# Altium PCB relay.PcbDoc (part 1 of 4)
Units mil, origin at the board's own origin, x right, y up, seen from the top; angles counter-clockwise.
Board outline 5718.69 x 3947.04 mil, 2 copper layers (Top Layer, Bottom Layer); 122 components, 108 nets, 435 pads, 81 vias.
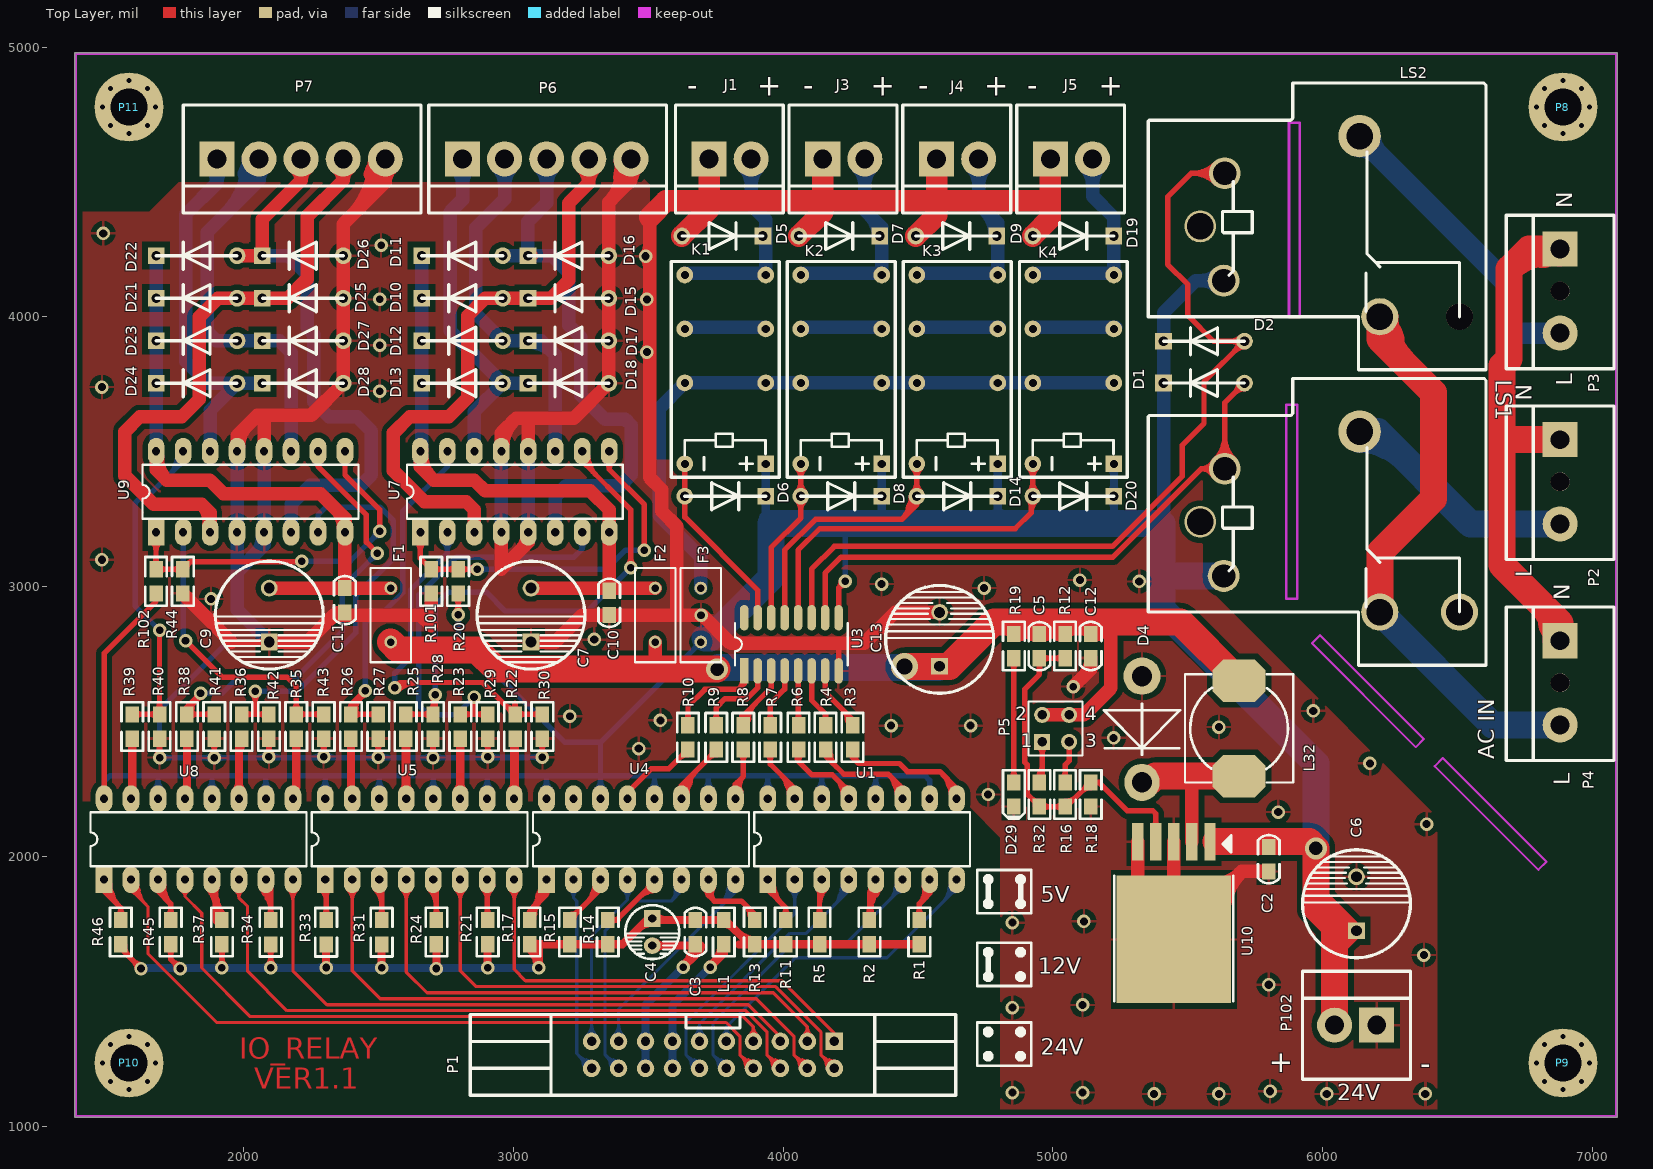
[diagram p0: Top Layer view]
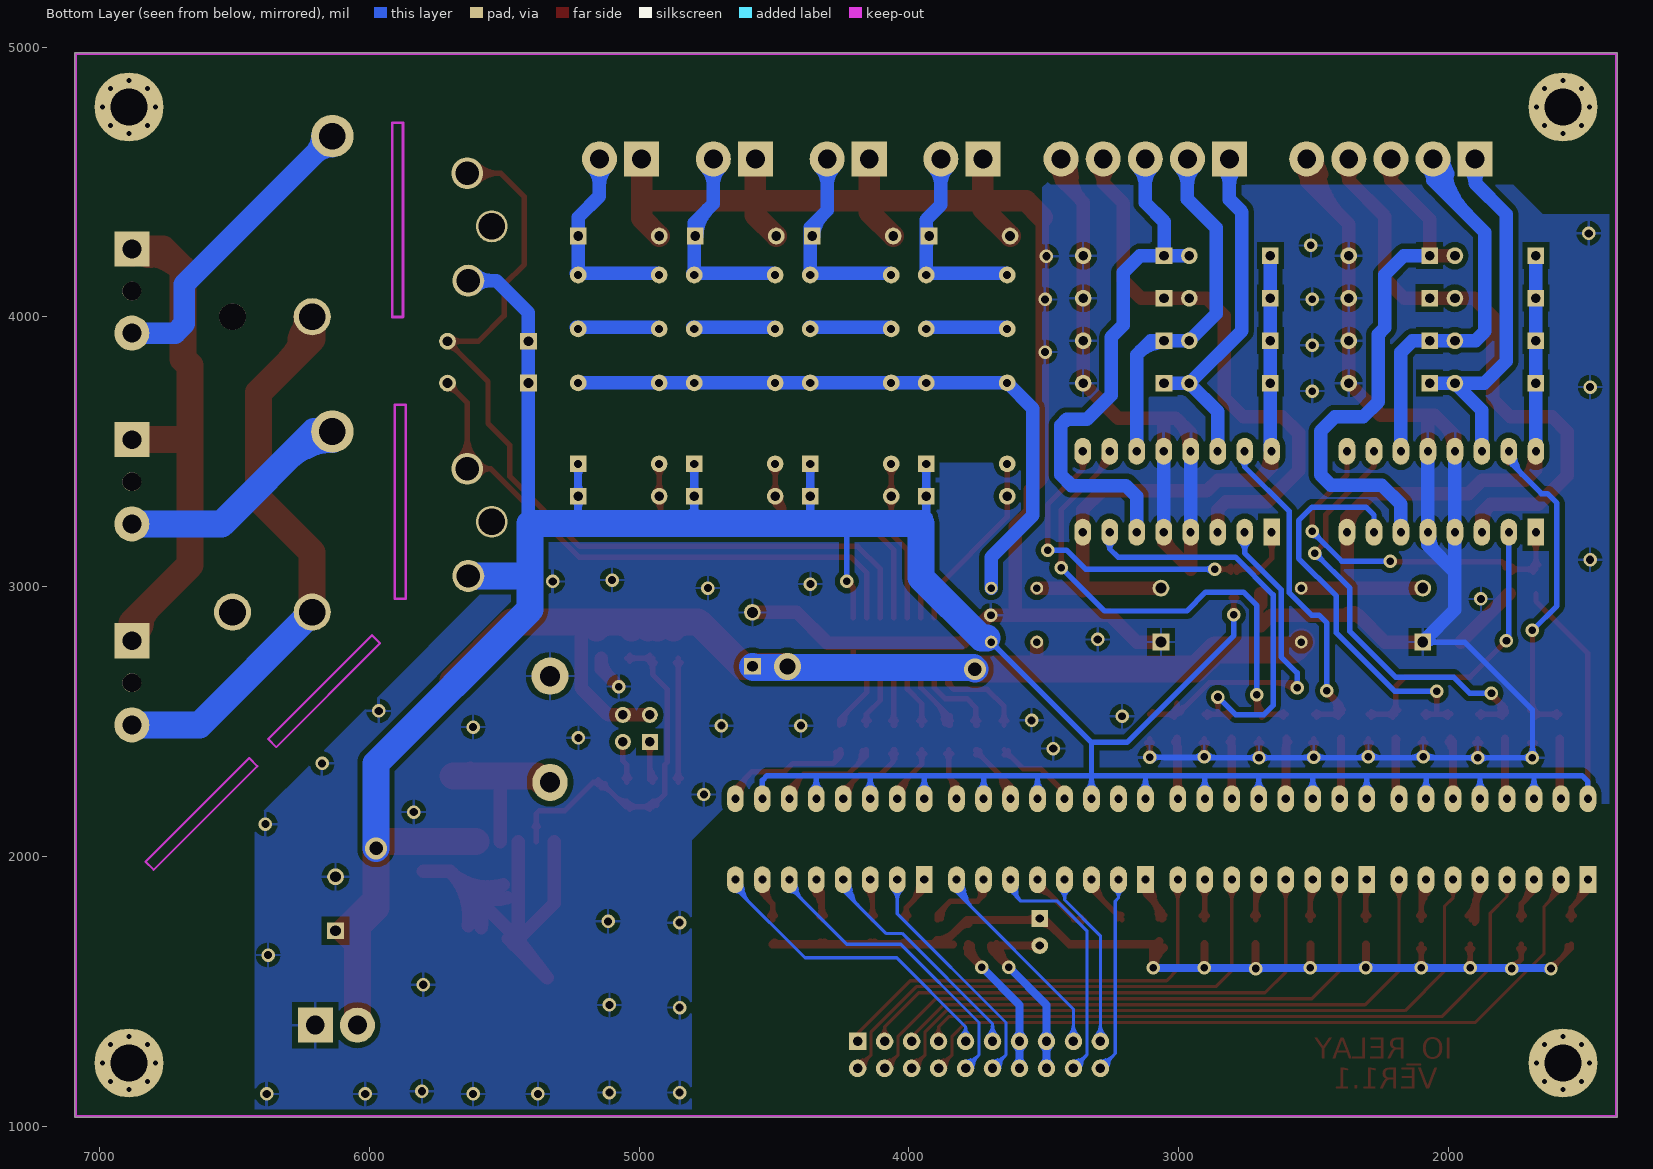
[diagram p1: Bottom Layer view, seen from below]

## Layer stack, top to bottom
Top Layer: signal copper 1.4
Dielectric: dielectric 12.6, FR-4, Dk 4.8
Bottom Layer: signal copper 1.4

## Board outline
1373.69,1037.99 ccw(c1378.7,1037.99) 1378.7,1032.98 7087.36,1032.98 ccw(c7087.36,1037.99) 7092.38,1037.99 7092.38,4975 ccw(c7087.36,4975) 7087.36,4980.02 1378.7,4980.02 ccw(c1378.7,4975) 1373.69,4975

## Design rules (kind name [scope] priority, off if disabled: settings)
Clearance Clearance_1 [IsRegion] p1: gap=20
Clearance [All] p2: gap=10
ComponentClearance [All] p1: gap=0 collisioncheckmode=3 verticalgap=10 showdistances=FALSE
PolygonConnect [All] p1: connectstyle=Relief reliefconductorwidth=10 reliefentries=4 polygonreliefangle="90 Angle"
RoomDefinition relay [InComponentClass('relay')] p1: confinementstyle=ConfineIn formatcopy=TRUE lockcomponents=FALSE outline 1433.6,1092.89 1433.6,4920.1 7032.46,4920.1 7032.46,4415 7051.63,4415 7051.63,1762 7032.46,1762 7032.46,1092.89
RoutingVias [All] p1: holewidth=28 width=50 viastyle="Through Hole" minholewidth=28 minwidth=50 maxholewidth=28 maxwidth=50
SilkscreenOverComponentPads [All] p1: minsilkscreentomaskgap=10
SolderMaskExpansion [All] p1: expansion=4
Width [All] p1: maxlimit=100 minlimit=10 preferedwidth=10
26 further rules are at their usual default settings.

## Components (designator, comment, footprint, x,y, rotation, side; value= is the part's Value field where it differs from the comment)
C2 "100nF" C0805 5800,1945 r90 top
C3 "100nF" C0805 3675,1675 r90 top
C4 "47uF/16V" CD1/2 3515,1670 r180 top
C5 "10nF" C0805 4950,2825 r270 top
C6 "100uF/50V" CD2/4#1 6125,1925 r0 top
C7 "100uF/50V" CD2/4#2 3065.63,2795 r180 top
C9 "100uF/50V" CD2/4#2 2095.63,2795 r180 top
C10 "100nF" C0805 3355.63,2895 r90 top
C11 "100nF" C0805 2375.63,2905 r90 top
C12 "100nF" C0805 5140,2735 r90 top
C13 "100uF/50V" CD2/4#1 4580,2905 r0 top
D1 "1N4007" V3 5410,3755 r180 top
D2 "1N4007" V3 5410,3910 r180 top
D4 "D1N5822" DO-201AD-H 5330,2668.7 r270 top
D5 "1N4007" V3 3925,4300 r0 top
D6 "1N4007" V3 3935.63,3335.55 r0 top
D7 "1N4007" V3 4358.33,4300 r0 top
D8 "1N4007" V3 4365.63,3335.55 r0 top
D9 "1N4007" V3 4791.67,4300 r0 top
D10 "1N4007" V3 2660.43,4069.49 r180 top
D11 "1N4007" V3 2660.43,4226.97 r180 top
D12 "1N4007" V3 2660.43,3912.01 r180 top
D13 "1N4007" V3 2660.43,3754.53 r180 top
D14 "1N4007" V3 4795.63,3335.55 r0 top
D15 "1N4007" V3 3054.13,4069.49 r180 top
D16 "1N4007" V3 3054.13,4226.97 r180 top
D17 "1N4007" V3 3054.13,3912.01 r180 top
D18 "1N4007" V3 3054.13,3754.53 r180 top
D19 "1N4007" V3 5225,4300 r0 top
D20 "1N4007" V3 5225.63,3335.55 r0 top
D21 "1N4007" V3 1676.18,4069.49 r180 top
D22 "1N4007" V3 1676.18,4226.97 r180 top
D23 "1N4007" V3 1676.18,3912.01 r180 top
D24 "1N4007" V3 1676.18,3754.53 r180 top
D25 "1N4007" V3 2069.88,4069.49 r180 top
D26 "1N4007" V3 2069.88,4226.97 r180 top
D27 "1N4007" V3 2069.88,3912.01 r180 top
D28 "1N4007" V3 2069.88,3754.53 r180 top
D29 "LED0" LED0805 4855,2275 r270 top
F1 "FRK300-60F" RAD-0.2 2545.63,2895 r270 top
F2 "FRK300-60F" RAD-0.2 3525.63,2895 r270 top
F3 "FRK300-60F" RAD-0.2 3695,2895 r90 top
J1 "下灯" 3.96-2 3725.63,4585.55 r180 top
J3 "Valve" 3.96-2 4146.73,4585.55 r180 top
J4 "档板" 3.96-2 4568.73,4585.55 r180 top
J5 "放气阀" 3.96-2 4990.73,4585.55 r180 top
K1 "DS2Y-S-DC24V" DS2Y-S 3935.63,3455.55 r270 top
K2 "DS2Y-S-DC24V" DS2Y-S 4365.63,3455.55 r270 top
K3 "DS2Y-S-DC24V" DS2Y-S 4795.63,3455.55 r270 top
K4 "DS2Y-S-DC24V" DS2Y-S 5225.63,3455.55 r270 top
L1 "BLM21PG331SN1" L0805 3780,1675 r90 top
L32 "5SLF10145T-470M1R" SLF10145 5690,2475 r180 top
LS1 "NT90RN1C" NT90HCE12CE#1 6616.73,3775.39 r270 top
LS2 "NT90RN1C" NT90HCE12CE#2 6616.73,4870.2 r270 top
P1 "RELAY" IDC20-EJ 4190,1315 r180 top
P2 "机械泵" 3.96-3 6880,3233 r90 top
P3 "真空计" 3.96-3 6880,3940 r90 top
P4 "AC IN" 3.96-3 6880,2488 r90 top
P5 "Header 2X2" HDR2X2 4960,2425 r0 top
P6 "Header 5" 3.96-5 2811.73,4585.55 r180 top
P7 "Header 5" 3.96-5 1901.47,4585.55 r180 top
P8 "Header 9" LK 6890.51,4778.15 r0 top
P9 "Header 9" LK 6890.51,1234.84 r0 top
P10 "Header 9" LK 1575.55,1234.84 r0 top
P11 "Header 9" LK 1575.55,4778.15 r0 top
P102 "24V" 3.96-2 6200,1375 r0 top
R1 "510" R0805 4505,1765 r270 top
R2 "510" R0805 4320,1765 r270 top
R3 "10K" R0805 4257.27,2396.89 r90 top
R4 "10K" R0805 4157.27,2396.89 r90 top
R5 "510" R0805 4135,1765 r270 top
R6 "10K" R0805 4057.27,2396.89 r90 top
R7 "10K" R0805 3952.27,2396.89 r90 top
R8 "10K" R0805 3852.27,2396.89 r90 top
R9 "10K" R0805 3752.27,2396.89 r90 top
R10 "10K" R0805 3647.27,2396.89 r90 top
R11 "510" R0805 4010,1765 r270 top
R12 "20K" R0805 5045,2735 r90 top
R13 "510" R0805 3895,1765 r270 top
R14 "510" R0805 3350,1765 r270 top
R15 "510" R0805 3210,1765 r270 top
R16 "6.8K" R0805 5045,2185 r90 top
R17 "510" R0805 3060,1765 r270 top
R18 "1K" R0805 5140,2275 r270 top
R19 "2.5K" R0805 4855,2735 r90 top
R20 "10K" R0805 2795.63,3065 r270 top
R21 "510" R0805 2905,1765 r270 top
R22 "10K" R0805 3006.35,2436.89 r90 top
R23 "10K" R0805 2803.64,2436.89 r90 top
R24 "510" R0805 2715,1765 r270 top
R25 "10K" R0805 2600.94,2436.89 r90 top
R26 "10K" R0805 2398.23,2436.89 r90 top
R27 "2.5K" R0805 2499.58,2436.89 r90 top
R28 "2.5K" R0805 2702.29,2436.89 r90 top
R29 "2.5K" R0805 2905,2436.89 r90 top
R30 "2.5K" R0805 3107.7,2436.89 r90 top
R31 "510" R0805 2512.1,1764.29 r270 top
R32 "20K" R0805 4950,2185 r90 top
R33 "510" R0805 2306.29,1764.29 r270 top
R34 "510" R0805 2100.49,1764.29 r270 top
R35 "10K" R0805 2195.53,2436.89 r90 top
R36 "10K" R0805 1992.82,2436.89 r90 top
R37 "510" R0805 1920,1765 r270 top
R38 "10K" R0805 1790.11,2436.89 r90 top
R39 "10K" R0805 1587.41,2436.89 r90 top
R40 "2.5K" R0805 1688.76,2436.89 r90 top
R41 "2.5K" R0805 1891.47,2436.89 r90 top
R42 "2.5K" R0805 2094.17,2436.89 r90 top
R43 "2.5K" R0805 2296.88,2436.89 r90 top
R44 "2.5K" R0805 1775,2975 r90 top
R45 "510" R0805 1730,1765 r270 top
R46 "510" R0805 1545,1765 r270 top
R101 "2.5K" R0805 2695.63,2975 r90 top
R102 "10K" R0805 1675.63,2975 r90 top
U1 "TLP521-4" DIP16 3943.07,1914.29 r90 top
U3 "ULN2003A" so16 3855.63,2688.15 r90 top
U4 "TLP521-4" DIP16 3123.07,1914.29 r90 top
U5 "TLP521-4" DIP16 2303.07,1914.29 r90 top
U7 "L293D" DIP16 2655.47,3202.09 r90 top
U8 "TLP521-4" DIP16 1483.07,1914.29 r90 top
U9 "L293D" DIP16 1676.18,3202.09 r90 top
U10 "LM2596S-5.0" TO263-5 5582,2055 r180 top

## Footprints (in the part's own frame and the unit in brackets; to place one, negate y for a bottom-side part, rotate by r counter-clockwise, add the part's x,y. Pads: shape width x height; smd on the part's side, far side on the other; paste and mask are expansions set on the pad)
3.96-2 [mil]
  rect 130x130 hole 70: 1(0,0)
  round 130 hole 70: 2(-156,0)
  silkscreen extent -275,-200 125,200
3.96-3 [mil]
  rect 130x130 hole 70: 1(312,0)
  round 70 hole 70 unplated: 2(156,0)
  round 130 hole 70: 3(0,0)
  silkscreen extent -132,-200 437,200
3.96-5 [mil]
  rect 130x130 hole 70: 1(0,0)
  round 130 hole 70: 2(-156,0) 3(-312,0) 4(-468,0) 5(-624,0)
  silkscreen extent -756,-200 125,200
C0805 [mil]
  rect 60x50 smd: 1(0,0) 2(90,0)
  silkscreen extent -44,-40 135,40
CD1/2 [mil]
  rect 62x62 hole 30: 1(0,-100)
  round 62 hole 30: 2(0,0)
  silkscreen extent -100,-150 100,50
CD2/4#1 [mil]
  rect 62x62 hole 40: 1(0,-200)
  round 62 hole 40: 2(0,0)
  silkscreen extent -200,-300 200,100
CD2/4#2 [mil]
  round 62 hole 40: 1(0,-200)
  rect 62x62 hole 40: 2(0,0)
  silkscreen extent -200,-300 200,100
DIP16 [mil]
  rect 100x62 hole 30: 1(0,0)
  oval 100x62 hole 30: 2(0,-100) 3(0,-200) 4(0,-300) 5(0,-400) 6(0,-500) 7(0,-600) 8(0,-700) 9(300,-700) 10(300,-600) 11(300,-500) 12(300,-400) 13(300,-300) 14(300,-200) 15(300,-100) 16(300,0)
  silkscreen extent 50,-750 250,50
DO-201AD-H [mm]
  round 3.5 hole 1.905: 1(0,0)
  oval 3.5x3.3 hole 1.905: 2(10,0)
  silkscreen extent 2.6,-3.6 7.4,3.6
DS2Y-S [mil]
  rect 62x62 hole 30: 1(0,0)
  round 62 hole 30: 4(-300,0) 6(-500,0) 8(-700,0) 9(-700,-300) 11(-500,-300) 13(-300,-300) 16(0,-300)
  silkscreen extent -750,-350 50,50
HDR2X2 [mm] "Connector; Header; 2x2 Position"
  rect 1.5x1.5 hole 0.9: 1(0,0)
  round 1.5 hole 0.9: 2(0,2.54) 3(2.54,0) 4(2.54,2.54)
  silkscreen extent -1.27,-1.27 3.81,3.81
IDC20-EJ [mil]
  rect 65x65 hole 35: 1(0,0)
  round 65 hole 35: 2(0,100) 3(100,0) 4(100,100) 5(200,0) 6(200,100) 7(300,0) 8(300,100) 9(400,0) 10(400,100) 11(500,0) 12(500,100) 13(600,0) 14(600,100) 15(700,0) 16(700,100) 17(800,0) 18(800,100) 19(900,0) 20(900,100)
  silkscreen extent -450,-100 1350,200
L0805 [mil]
  rect 60x50 smd: 1(0,0) 2(90,0)
  silkscreen extent -45,-40 135,40
LED0805 [mil]
  rect 60x50 smd: 1(0,0) 2(90,0)
  silkscreen extent -45,-40 135,40
LK [mm]
  round 6.5 hole 3.5: 1(0,0)
  round 1 hole 0.5: 2(0,2.5) 3(2.5,0) 4(0,-2.5) 5(-1.75,-1.75) 6(-1.75,1.75) 7(1.75,1.75) 8(1.75,-1.75) 9(-2.5,0)
NT90HCE12CE#1 [mm]
  round 4 hole 2.5: 1(5.08,-12.192)
  round 3.5 hole 2.5: 2(22.08,-2.792) 3(22.08,-10.292)
  round 3 hole 2.2: 4(18.68,-24.992) 5(8.58,-24.892)
  round 3 hole 2.5: 6(13.58,-27.192)
  silkscreen extent 0.08,-32.09 27.08,-0.29
NT90HCE12CE#2 [mm]
  round 4 hole 2.5: 1(5.08,-12.192)
  round 2.5 hole 2.5: 2(22.08,-2.792)
  round 3.5 hole 2.5: 3(22.08,-10.292)
  round 3 hole 2.2: 4(18.68,-24.992) 5(8.58,-24.892)
  round 3 hole 2.5: 6(13.58,-27.192)
  silkscreen extent 0.08,-32.09 27.08,-0.29
R0805 [mil]
  rect 60x50 smd: 1(0,0) 2(90,0)
  silkscreen extent -45,-40 135,40
RAD-0.2 [mm] "Radial Cap, Thru-Hole; 2 Leads; 0.2 in Pin Spacing"
  round 1.2 hole 0.7: 1(-2.54,0) 2(2.54,0)
  silkscreen extent -4.44,-1.91 4.44,1.91
SLF10145 [mm]
  oct 5x4 smd: 1(0,4.5) 2(0,-4.5)
  silkscreen extent -5.1,-5.1 5.1,5.1
so16 [mm]
  rect 2.4x0.8 smd: 1(0,0)
  oval 2.4x0.8 smd: 2(0,-1.27) 3(0,-2.54) 4(0,-3.81) 5(0,-5.08) 6(0,-6.35) 7(0,-7.62) 8(0,-8.89) 9(5,-8.89) 10(5,-7.62) 11(5,-6.35) 12(5,-5.08) 13(5,-3.81) 14(5,-2.54) 15(5,-1.27) 16(5,0)
  silkscreen extent 0.5,-9.74 4.5,0.85
TO263-5 [mil]
  rect 42x137.8 smd: 1(0,0) 2(67,0) 3(134,0) 4(201,0) 5(268,0)
  rect 425x472.44 smd: A(133.86,362.2)
  silkscreen extent -87,-24 354,591
V3 [mil]
  round 62 hole 36: 1(-300,0)
  rect 62x62 hole 36: 2(0,0)
  silkscreen extent -300,-50 0,50

## Part data
C2 C3 C5 C10 C11 C12: library part Cap, "C"
C4: library part CD1, "Electrolytic Capac"
C6 C7 C9 C13: library part "Cap Pol1", "Polarized Capacitor (Rad"
D1 D2 D5 D6 D7 D8 D9 D10 D11 D12 D13 D14 D15 D16 D17 D18 D19 D20 D21 D22 D23 D24 D25 D26 D27 D28: library part 2JG, "D"
D4: library part DIODE, "D"
D29: "Typical INFRARED"
F1 F2 F3: library part FUSE1, "Fuse"
J1 J3 J4 J5: library part CON2, "Connect"
K1 K2 K3 K4: library part DS
LS1 LS2: library part NT90
P1: library part "Header 10X2", "Header, 10-Pin, Dual r"
P2 P3 P4: library part "Header 3H", "Header, 3-Pin, Right Ang"
P5: "Header, 2-Pin, Dual row"
P6 P7: "Header, 5-P"
P8 P9 P10 P11: "Header, 9-P"
P102: library part "Header 2", "Header, 2-P"
R1 R2 R3 R4 R5 R6 R7 R8 R9 R10 R11 R12 R13 R14 R15 R16 R17 R18 R19 R20 R21 R22 R23 R24 R25 R26 R27 R28 R29 R30 R31 R32 R33 R34 R35 R36 R37 R38 R39 R40 R41 R42 R43 R44 R45 R46 R101 R102: library part Res1
U1 U4 U5 U8: library part TLP5
U3: "HIGH-VOLTAGE,HIGH-CURRENT DARLINGTON ARRAYS"
U7 U9: library part L29
U10: library part LM2596, "SIMPLESWITCHER PowerConverter150kHz 3A Step-DownVoltageR"

## Via types
v1: diameter 50, hole 28, Top Layer to Bottom Layer, 42 vias
v2: diameter 50, hole 30, Top Layer to Bottom Layer, 36 vias
v3: diameter 80, hole 50, Top Layer to Bottom Layer, 2 vias
v4: diameter 100, hole 60, Top Layer to Bottom Layer, 1 vias

## Nets (pads, with @x,y where several pads share a name; then routed paths per layer and width w, separated by ;. In a path a pad name is that pad's centre, name@x,y a point inside that pad or via, vN(x,y) a via of type N, cw(c..) or ccw(c..) an arc to the next point about the centre after c; other vN are vias at no path point)
+5V: C3.2 C4.1 L1.2 R1.2 R2.2 R5.2 R11.2 R13.2 R14.2 R15.2 R17.2 R21.2 R24.2 R31.2 R33.2 R34.2 R37.2 R45.2 R46.2 | length 8510.5
  Top Layer w20: R46.2@1545,1675 1545,1660 v1(1620,1585) ; R45.2@1730,1675 1730,1620 v1(1765,1585) ; v1(1920,1587.44) R37.2@1920,1675 ; v1(2100.49,1587.93) R34.2@2100.49,1674.29 ; R46.2@1560,1670 ccw(c1620.36,1670) 1577.68,1627.32 ; R46.2@1560,1670 ccw(c1620.36,1670) 1577.68,1627.32 ; R46.2@1560,1670 ccw(c1620.36,1670) 1577.68,1627.32 ; 1594.39,1610.61 ccw(c1620,1636.21) v1@1620,1600 ; 1594.39,1610.61 cw(c1568.79,1585) v1@1605,1585 ; 1594.39,1610.61 ccw(c1620,1636.21) v1@1620,1600 ; 1594.39,1610.61 cw(c1568.79,1585) v1@1605,1585 ; 1594.39,1610.61 ccw(c1620,1636.21) v1@1620,1600 ; 1594.39,1610.61 cw(c1568.79,1585) v1@1605,1585 ; R45.2@1719.39,1659.39 cw(c1693.79,1633.79) 1730,1633.79 ; R45.2@1719.39,1659.39 cw(c1693.79,1633.79) 1730,1633.79 ; R45.2@1719.39,1659.39 cw(c1693.79,1633.79) 1730,1633.79 ; 1730,1633.79 cw(c1766.21,1633.79) R45.2@1740.61,1659.39 ; 1730,1633.79 cw(c1766.21,1633.79) R45.2@1740.61,1659.39 ; 1730,1633.79 cw(c1766.21,1633.79) R45.2@1740.61,1659.39 ; 1739.39,1610.61 ccw(c1765,1636.21) v1@1765,1600 ; 1739.39,1610.61 cw(c1713.79,1585) v1@1750,1585 ; 1739.39,1610.61 ccw(c1765,1636.21) v1@1765,1600 ; 1739.39,1610.61 cw(c1713.79,1585) v1@1750,1585 ; 1739.39,1610.61 ccw(c1765,1636.21) v1@1765,1600 ; 1739.39,1610.61 cw(c1713.79,1585) v1@1750,1585 ; v1@1909.39,1598.05 ccw(c1883.79,1623.65) 1920,1623.65 ; v1@1909.39,1598.05 ccw(c1883.79,1623.65) 1920,1623.65 ; v1@1909.39,1598.05 ccw(c1883.79,1623.65) 1920,1623.65 ; R37.2@1909.39,1659.39 cw(c1883.79,1633.79) 1920,1633.79 ; R37.2@1909.39,1659.39 cw(c1883.79,1633.79) 1920,1633.79 ; R37.2@1909.39,1659.39 cw(c1883.79,1633.79) 1920,1633.79 ; 1920,1623.65 ccw(c1956.21,1623.65) v1@1930.61,1598.05 ; 1920,1623.65 ccw(c1956.21,1623.65) v1@1930.61,1598.05 ; 1920,1623.65 ccw(c1956.21,1623.65) v1@1930.61,1598.05 ; 1920,1633.79 cw(c1956.21,1633.79) R37.2@1930.61,1659.39 ; 1920,1633.79 cw(c1956.21,1633.79) R37.2@1930.61,1659.39 ; 1920,1633.79 cw(c1956.21,1633.79) R37.2@1930.61,1659.39 ; v1@2089.88,1598.54 ccw(c2064.27,1624.14) 2100.49,1624.14 ; v1@2089.88,1598.54 ccw(c2064.27,1624.14) 2100.49,1624.14 ; v1@2089.88,1598.54 ccw(c2064.27,1624.14) 2100.49,1624.14 ; R34.2@2089.88,1658.68 cw(c2064.27,1633.08) 2100.49,1633.08 ; R34.2@2089.88,1658.68 cw(c2064.27,1633.08) 2100.49,1633.08 ; R34.2@2089.88,1658.68 cw(c2064.27,1633.08) 2100.49,1633.08 ; 2100.49,1624.14 ccw(c2136.7,1624.14) v1@2111.09,1598.54 ; 2100.49,1624.14 ccw(c2136.7,1624.14) v1@2111.09,1598.54 ; 2100.49,1624.14 ccw(c2136.7,1624.14) v1@2111.09,1598.54 ; 2100.49,1633.08 cw(c2136.7,1633.08) R34.2@2111.09,1658.68 ; 2100.49,1633.08 cw(c2136.7,1633.08) R34.2@2111.09,1658.68 ; 2100.49,1633.08 cw(c2136.7,1633.08) R34.2@2111.09,1658.68
  Top Layer w30: v1(2306.29,1588.73) R33.2@2306.29,1674.29 ; v1(2512.1,1587.1) R31.2@2512.1,1674.29 ; v1(2715,1585) R24.2@2715,1675 ; v1(2905,1587.44) R21.2@2905,1675 ; v1(3095,1587.44) 3095,1675 R15.2@3210,1675 R14.2@3350,1675 3405,1675 3495,1765 C3.2@3675,1765 L1.2@3780,1765 3785,1765 3875,1675 R13.2@3895,1675 R11.2@4010,1675 R5.2@4135,1675 R2.2@4320,1675 R1.2@4505,1675 ; 3835.71,1674.29 R1.2@4505,1674.29 ; 3865.43,1695.91 ccw(c3883.91,1714.38) R13.2@3891.93,1689.52 ; R17.2@3054.02,1661.98 cw(c2993.16,1580.33) v1@3095,1580.33 ; R17.2@3054.02,1661.98 cw(c2993.16,1580.33) v1@3095,1580.33 ; R17.2@3054.02,1661.98 cw(c2993.16,1580.33) v1@3095,1580.33 ; R17.2@3069.93,1668.83 ccw(c3126.66,1662.17) 3081.84,1626.77 ; R17.2@3069.93,1668.83 ccw(c3126.66,1662.17) 3081.84,1626.77 ; R17.2@3069.93,1668.83 ccw(c3126.66,1662.17) 3081.84,1626.77 ; R17.2@3071.95,1686.04 cw(c3037.72,1640.11) 3095,1640.11 ; R17.2@3071.95,1686.04 cw(c3037.72,1640.11) 3095,1640.11 ; R17.2@3071.95,1686.04 cw(c3037.72,1640.11) 3095,1640.11 ; 3085.82,1614.57 ccw(c3115.21,1622.45) v1@3100,1596.1 ; 3085.82,1614.57 ccw(c3115.21,1622.45) v1@3100,1596.1 ; 3085.82,1614.57 ccw(c3115.21,1622.45) v1@3100,1596.1 ; 3085.82,1614.57 ccw(c3115.21,1622.45) v1@3100,1596.1 ; 3085.82,1614.57 ccw(c3115.21,1622.45) v1@3100,1596.1 ; 3085.82,1614.57 ccw(c3115.21,1622.45) v1@3100,1596.1 ; 3462.08,1732.08 cw(c3515,1679.16) C4.1@3515,1754 ; 3462.08,1732.08 cw(c3515,1679.16) C4.1@3515,1754 ; 3462.08,1732.08 cw(c3515,1679.16) C4.1@3515,1754 ; C4.1@3526.31,1781.31 ccw(c3565.7,1820.7) 3565.7,1765 ; C4.1@3526.31,1781.31 ccw(c3565.7,1820.7) 3565.7,1765 ; C4.1@3526.31,1781.31 ccw(c3565.7,1820.7) 3565.7,1765 ; L1.2@3780,1750 cw(c3780,1701.72) 3814.14,1735.86 ; L1.2@3780,1750 cw(c3780,1701.72) 3814.14,1735.86 ; L1.2@3780,1750 cw(c3780,1701.72) 3814.14,1735.86 ; 3835.25,1714.75 ccw(c3895,1774.5) R13.2@3895,1690 ; 3835.25,1714.75 ccw(c3895,1774.5) R13.2@3895,1690 ; 3835.25,1714.75 ccw(c3895,1774.5) R13.2@3895,1690 ; 3851.66,1701.61 cw(c3836.87,1646.44) R13.2@3886.34,1675 ; 3851.66,1701.61 cw(c3836.87,1646.44) R13.2@3886.34,1675 ; 3851.66,1701.61 cw(c3836.87,1646.44) R13.2@3886.34,1675 ; 3869.15,1674.29 ccw(c3869.15,1700.85) R13.2@3887.93,1682.07 ; 3869.15,1674.29 ccw(c3869.15,1700.85) R13.2@3887.93,1682.07 ; 3869.15,1674.29 ccw(c3869.15,1700.85) R13.2@3887.93,1682.07 ; R13.2@3902.07,1682.07 ccw(c3920.85,1700.85) 3920.85,1674.29 ; R13.2@3902.07,1682.07 ccw(c3920.85,1700.85) 3920.85,1674.29 ; R13.2@3902.07,1682.07 ccw(c3920.85,1700.85) 3920.85,1674.29 ; 3984.15,1674.29 ccw(c3984.15,1700.85) R11.2@4002.93,1682.07 ; 3984.15,1674.29 ccw(c3984.15,1700.85) R11.2@4002.93,1682.07 ; 3984.15,1674.29 ccw(c3984.15,1700.85) R11.2@4002.93,1682.07 ; R11.2@4017.07,1682.07 ccw(c4035.85,1700.85) 4035.85,1674.29 ; R11.2@4017.07,1682.07 ccw(c4035.85,1700.85) 4035.85,1674.29 ; R11.2@4017.07,1682.07 ccw(c4035.85,1700.85) 4035.85,1674.29 ; 4109.15,1674.29 ccw(c4109.15,1700.85) R5.2@4127.93,1682.07 ; 4109.15,1674.29 ccw(c4109.15,1700.85) R5.2@4127.93,1682.07 ; 4109.15,1674.29 ccw(c4109.15,1700.85) R5.2@4127.93,1682.07 ; R5.2@4142.07,1682.07 ccw(c4160.85,1700.85) 4160.85,1674.29 ; R5.2@4142.07,1682.07 ccw(c4160.85,1700.85) 4160.85,1674.29 ; R5.2@4142.07,1682.07 ccw(c4160.85,1700.85) 4160.85,1674.29 ; 4294.15,1674.29 ccw(c4294.15,1700.85) R2.2@4312.93,1682.07 ; 4294.15,1674.29 ccw(c4294.15,1700.85) R2.2@4312.93,1682.07 ; 4294.15,1674.29 ccw(c4294.15,1700.85) R2.2@4312.93,1682.07 ; R2.2@4327.07,1682.07 ccw(c4345.85,1700.85) 4345.85,1674.29 ; R2.2@4327.07,1682.07 ccw(c4345.85,1700.85) 4345.85,1674.29 ; R2.2@4327.07,1682.07 ccw(c4345.85,1700.85) 4345.85,1674.29 ; 4479.15,1674.29 ccw(c4479.15,1700.85) R1.2@4497.93,1682.07 ; 4479.15,1674.29 ccw(c4479.15,1700.85) R1.2@4497.93,1682.07 ; 4479.15,1674.29 ccw(c4479.15,1700.85) R1.2@4497.93,1682.07
  Bottom Layer w20: v1(1620,1585) v1@1620,1587.44 ; v1(2306.29,1588.73) v1@2307.59,1587.44
  Bottom Layer w30: v1@1620,1587.44 v1(1920,1587.44) 2307.59,1587.44 2512.44,1587.44 v1(2512.1,1587.1) 3094.66,1587.1 v1(3095,1587.44) ; v1@1627.07,1577.93 cw(c1650.04,1554.96) 1650.04,1587.44 ; v1@1627.07,1577.93 cw(c1650.04,1554.96) 1650.04,1587.44 ; v1@1627.07,1577.93 cw(c1650.04,1554.96) 1650.04,1587.44 ; 1734.96,1587.44 cw(c1734.96,1554.96) v1@1757.93,1577.93 ; 1734.96,1587.44 cw(c1734.96,1554.96) v1@1757.93,1577.93 ; 1734.96,1587.44 cw(c1734.96,1554.96) v1@1757.93,1577.93 ; v1@1772.07,1577.93 cw(c1795.04,1554.96) 1795.04,1587.44 ; v1@1772.07,1577.93 cw(c1795.04,1554.96) 1795.04,1587.44 ; v1@1772.07,1577.93 cw(c1795.04,1554.96) 1795.04,1587.44 ; 2075.17,1587.44 ccw(c2075.17,1613.25) v1@2093.42,1595 ; 2075.17,1587.44 ccw(c2075.17,1613.25) v1@2093.42,1595 ; 2075.17,1587.44 ccw(c2075.17,1613.25) v1@2093.42,1595 ; v1@2107.56,1595 ccw(c2125.81,1613.25) 2125.81,1587.44 ; v1@2107.56,1595 ccw(c2125.81,1613.25) 2125.81,1587.44 ; v1@2107.56,1595 ccw(c2125.81,1613.25) 2125.81,1587.44 ; 2279.03,1587.44 ccw(c2279.03,1616) v1@2299.22,1595.81 ; 2279.03,1587.44 ccw(c2279.03,1616) v1@2299.22,1595.81 ; 2279.03,1587.44 ccw(c2279.03,1616) v1@2299.22,1595.81 ; v1@2313.36,1595.81 ccw(c2333.56,1616) 2333.56,1587.44 ; v1@2313.36,1595.81 ccw(c2333.56,1616) 2333.56,1587.44 ; v1@2313.36,1595.81 ccw(c2333.56,1616) 2333.56,1587.44 ; 2685.79,1587.1 cw(c2685.79,1555.79) v1@2707.93,1577.93 ; 2685.79,1587.1 cw(c2685.79,1555.79) v1@2707.93,1577.93 ; 2685.79,1587.1 cw(c2685.79,1555.79) v1@2707.93,1577.93 ; v1@2722.07,1577.93 cw(c2744.21,1555.79) 2744.21,1587.1 ; v1@2722.07,1577.93 cw(c2744.21,1555.79) 2744.21,1587.1 ; v1@2722.07,1577.93 cw(c2744.21,1555.79) 2744.21,1587.1
GND: C3.1 C4.2 P1.15 P1.16 | length 2120.1
  Top Layer w30: C4.2@3515,1675 C4.2@3515,1670 3670,1670 C3.1@3675,1675 3675,1635 v1(3630,1590) ; 3659.09,1640.43 ccw(c3640.62,1658.91) C3.1@3665.48,1666.93 ; C4.2@3526.31,1658.69 cw(c3553.63,1631.37) 3553.63,1670 ; C4.2@3526.31,1658.69 cw(c3553.63,1631.37) 3553.63,1670 ; C4.2@3526.31,1658.69 cw(c3553.63,1631.37) 3553.63,1670 ; C4.2@3526.31,1681.31 ccw(c3553.63,1708.63) 3553.63,1670 ; C4.2@3526.31,1681.31 ccw(c3553.63,1708.63) 3553.63,1670 ; C4.2@3526.31,1681.31 ccw(c3553.63,1708.63) 3553.63,1670 ; v1@3627.41,1599.66 ccw(c3620.13,1626.82) 3644.48,1612.76 ; v1@3627.41,1599.66 ccw(c3620.13,1626.82) 3644.48,1612.76 ; v1@3627.41,1599.66 ccw(c3620.13,1626.82) 3644.48,1612.76 ; v1@3627.41,1599.66 ccw(c3620.13,1626.82) 3644.48,1612.76 ; v1@3627.41,1599.66 ccw(c3620.13,1626.82) 3644.48,1612.76 ; v1@3627.41,1599.66 ccw(c3620.13,1626.82) 3644.48,1612.76 ; v1@3633.18,1593.18 ccw(c3556.36,1670) C3.1@3665,1670 ; v1@3633.18,1593.18 ccw(c3556.36,1670) C3.1@3665,1670 ; v1@3633.18,1593.18 ccw(c3556.36,1670) C3.1@3665,1670 ; 3653.39,1626.66 cw(c3708.56,1611.87) C3.1@3680,1661.34 ; 3653.39,1626.66 cw(c3708.56,1611.87) C3.1@3680,1661.34 ; 3653.39,1626.66 cw(c3708.56,1611.87) C3.1@3680,1661.34 ; 3684.39,1644.39 ccw(c3658.79,1670) C3.1@3695,1670 ; 3684.39,1644.39 ccw(c3658.79,1670) C3.1@3695,1670 ; 3684.39,1644.39 ccw(c3658.79,1670) C3.1@3695,1670
  Bottom Layer w30: P1.16@3490,1215 P1.15@3490,1315 3490,1450 v1(3630,1590) ; P1.16@3477.63,1227.37 ccw(c3447.75,1257.25) 3490,1257.25 ; P1.16@3477.63,1227.37 ccw(c3447.75,1257.25) 3490,1257.25 ; P1.16@3477.63,1227.37 ccw(c3447.75,1257.25) 3490,1257.25 ; P1.15@3477.63,1302.63 cw(c3447.75,1272.75) 3490,1272.75 ; P1.15@3477.63,1302.63 cw(c3447.75,1272.75) 3490,1272.75 ; P1.15@3477.63,1302.63 cw(c3447.75,1272.75) 3490,1272.75 ; P1.15@3477.63,1327.37 ccw(c3447.75,1357.25) 3490,1357.25 ; P1.15@3477.63,1327.37 ccw(c3447.75,1357.25) 3490,1357.25 ; P1.15@3477.63,1327.37 ccw(c3447.75,1357.25) 3490,1357.25 ; 3490,1257.25 ccw(c3532.25,1257.25) P1.16@3502.37,1227.37 ; 3490,1257.25 ccw(c3532.25,1257.25) P1.16@3502.37,1227.37 ; 3490,1257.25 ccw(c3532.25,1257.25) P1.16@3502.37,1227.37 ; 3490,1272.75 cw(c3532.25,1272.75) P1.15@3502.37,1302.63 ; 3490,1272.75 cw(c3532.25,1272.75) P1.15@3502.37,1302.63 ; 3490,1272.75 cw(c3532.25,1272.75) P1.15@3502.37,1302.63 ; 3490,1357.25 ccw(c3532.25,1357.25) P1.15@3502.37,1327.37 ; 3490,1357.25 ccw(c3532.25,1357.25) P1.15@3502.37,1327.37 ; 3490,1357.25 ccw(c3532.25,1357.25) P1.15@3502.37,1327.37
GND_24V: C2.1 C6.2 C7.2 C9.2 C10.1 C11.1 C12.1 C13.2 D4.1 D5.1 D7.1 D9.1 D15.1 D16.1 D17.1 D18.1 D19.1 D25.1 D26.1 D27.1 D28.1 D29.2 J1.1 J3.1 J4.1 J5.1 P6.5 P7.5 P102.1 R18.2 R27.1 R28.1 R29.1 R30.1 R40.1 R41.1 R42.1 R43.1 R44.1 R101.1 U3.8 U7.4 U7.5 U7.12 U7.13 U9.4 U9.5 U9.12 U9.13 U10.3 U10.5 U10.A | length 32531.9
  Top Layer w20: v1(1688.76,2366.87) R40.1@1688.76,2436.89 ; v1(1891.47,2365.84) R41.1@1891.47,2436.89 ; 1955,2795 C9.2@2095.63,2795 ; v1(2094.17,2370.41) R42.1@2094.17,2436.89 ; v1(2296.88,2370.62) R43.1@2296.88,2436.89 ; v1(2499.58,2367.91) R27.1@2499.58,2436.89 ; 2695.63,2855 2695.63,2935 ; v1(2702.29,2366.66) R28.1@2702.29,2436.89 ; v1(2905,2369.37) R29.1@2905,2436.89 ; v1(3107.7,2367.93) R30.1@3107.7,2436.89 ; U3.8@4205.63,2688.15 4205.63,2780.63 ; v1@1678.16,2377.47 ccw(c1652.55,2403.08) 1688.76,2403.08 ; v1@1678.16,2377.47 ccw(c1652.55,2403.08) 1688.76,2403.08 ; v1@1678.16,2377.47 ccw(c1652.55,2403.08) 1688.76,2403.08 ; R40.1@1678.16,2421.28 cw(c1652.55,2395.68) 1688.76,2395.68 ; R40.1@1678.16,2421.28 cw(c1652.55,2395.68) 1688.76,2395.68 ; R40.1@1678.16,2421.28 cw(c1652.55,2395.68) 1688.76,2395.68 ; 1688.76,2395.68 cw(c1724.97,2395.68) R40.1@1699.37,2421.28 ; 1688.76,2395.68 cw(c1724.97,2395.68) R40.1@1699.37,2421.28 ; 1688.76,2395.68 cw(c1724.97,2395.68) R40.1@1699.37,2421.28 ; 1688.76,2403.08 ccw(c1724.97,2403.08) v1@1699.37,2377.47 ; 1688.76,2403.08 ccw(c1724.97,2403.08) v1@1699.37,2377.47 ; 1688.76,2403.08 ccw(c1724.97,2403.08) v1@1699.37,2377.47 ; v1@1880.86,2376.44 ccw(c1855.25,2402.05) 1891.47,2402.05 ; v1@1880.86,2376.44 ccw(c1855.25,2402.05) 1891.47,2402.05 ; v1@1880.86,2376.44 ccw(c1855.25,2402.05) 1891.47,2402.05 ; R41.1@1880.86,2421.28 cw(c1855.25,2395.68) 1891.47,2395.68 ; R41.1@1880.86,2421.28 cw(c1855.25,2395.68) 1891.47,2395.68 ; R41.1@1880.86,2421.28 cw(c1855.25,2395.68) 1891.47,2395.68 ; 1891.47,2395.68 cw(c1927.68,2395.68) R41.1@1902.07,2421.28 ; 1891.47,2395.68 cw(c1927.68,2395.68) R41.1@1902.07,2421.28 ; 1891.47,2395.68 cw(c1927.68,2395.68) R41.1@1902.07,2421.28 ; 1891.47,2402.05 ccw(c1927.68,2402.05) v1@1902.07,2376.44 ; 1891.47,2402.05 ccw(c1927.68,2402.05) v1@1902.07,2376.44 ; 1891.47,2402.05 ccw(c1927.68,2402.05) v1@1902.07,2376.44 ; 2044.93,2795 ccw(c2044.93,2845.7) C9.2@2080.78,2809.85 ; 2044.93,2795 cw(c2044.93,2744.3) C9.2@2080.78,2780.15 ; 2044.93,2795 ccw(c2044.93,2845.7) C9.2@2080.78,2809.85 ; 2044.93,2795 cw(c2044.93,2744.3) C9.2@2080.78,2780.15 ; 2044.93,2795 ccw(c2044.93,2845.7) C9.2@2080.78,2809.85 ; 2044.93,2795 cw(c2044.93,2744.3) C9.2@2080.78,2780.15 ; v1@2083.57,2381.02 ccw(c2057.96,2406.62) 2094.17,2406.62 ; v1@2083.57,2381.02 ccw(c2057.96,2406.62) 2094.17,2406.62 ; v1@2083.57,2381.02 ccw(c2057.96,2406.62) 2094.17,2406.62 ; R42.1@2083.57,2421.28 cw(c2057.96,2395.68) 2094.17,2395.68 ; R42.1@2083.57,2421.28 cw(c2057.96,2395.68) 2094.17,2395.68 ; R42.1@2083.57,2421.28 cw(c2057.96,2395.68) 2094.17,2395.68 ; 2094.17,2395.68 cw(c2130.39,2395.68) R42.1@2104.78,2421.28 ; 2094.17,2395.68 cw(c2130.39,2395.68) R42.1@2104.78,2421.28 ; 2094.17,2395.68 cw(c2130.39,2395.68) R42.1@2104.78,2421.28 ; 2094.17,2406.62 ccw(c2130.39,2406.62) v1@2104.78,2381.02 ; 2094.17,2406.62 ccw(c2130.39,2406.62) v1@2104.78,2381.02 ; 2094.17,2406.62 ccw(c2130.39,2406.62) v1@2104.78,2381.02 ; v1@2286.27,2381.23 ccw(c2260.67,2406.83) 2296.88,2406.83 ; v1@2286.27,2381.23 ccw(c2260.67,2406.83) 2296.88,2406.83 ; v1@2286.27,2381.23 ccw(c2260.67,2406.83) 2296.88,2406.83 ; R43.1@2286.27,2421.28 cw(c2260.67,2395.68) 2296.88,2395.68 ; R43.1@2286.27,2421.28 cw(c2260.67,2395.68) 2296.88,2395.68 ; R43.1@2286.27,2421.28 cw(c2260.67,2395.68) 2296.88,2395.68 ; 2296.88,2395.68 cw(c2333.09,2395.68) R43.1@2307.49,2421.28 ; 2296.88,2395.68 cw(c2333.09,2395.68) R43.1@2307.49,2421.28 ; 2296.88,2395.68 cw(c2333.09,2395.68) R43.1@2307.49,2421.28 ; 2296.88,2406.83 ccw(c2333.09,2406.83) v1@2307.49,2381.23 ; 2296.88,2406.83 ccw(c2333.09,2406.83) v1@2307.49,2381.23 ; 2296.88,2406.83 ccw(c2333.09,2406.83) v1@2307.49,2381.23 ; v1@2488.98,2378.52 ccw(c2463.37,2404.13) 2499.58,2404.13 ; v1@2488.98,2378.52 ccw(c2463.37,2404.13) 2499.58,2404.13 ; v1@2488.98,2378.52 ccw(c2463.37,2404.13) 2499.58,2404.13 ; R27.1@2488.98,2421.28 cw(c2463.37,2395.68) 2499.58,2395.68 ; R27.1@2488.98,2421.28 cw(c2463.37,2395.68) 2499.58,2395.68 ; R27.1@2488.98,2421.28 cw(c2463.37,2395.68) 2499.58,2395.68 ; 2499.58,2395.68 cw(c2535.8,2395.68) R27.1@2510.19,2421.28 ; 2499.58,2395.68 cw(c2535.8,2395.68) R27.1@2510.19,2421.28 ; 2499.58,2395.68 cw(c2535.8,2395.68) R27.1@2510.19,2421.28 ; 2499.58,2404.13 ccw(c2535.8,2404.13) v1@2510.19,2378.52 ; 2499.58,2404.13 ccw(c2535.8,2404.13) v1@2510.19,2378.52 ; 2499.58,2404.13 ccw(c2535.8,2404.13) v1@2510.19,2378.52 ; R101.1@2685.02,2959.39 cw(c2659.42,2933.79) 2695.63,2933.79 ; R101.1@2685.02,2959.39 cw(c2659.42,2933.79) 2695.63,2933.79 ; R101.1@2685.02,2959.39 cw(c2659.42,2933.79) 2695.63,2933.79 ; R101.1@2685.29,2959.14 cw(c2662.3,2935) 2695.63,2935 ; R101.1@2685.29,2959.14 cw(c2662.3,2935) 2695.63,2935 ; R101.1@2685.29,2959.14 cw(c2662.3,2935) 2695.63,2935 ; v1@2691.68,2377.27 ccw(c2666.08,2402.87) 2702.29,2402.87 ; v1@2691.68,2377.27 ccw(c2666.08,2402.87) 2702.29,2402.87 ; v1@2691.68,2377.27 ccw(c2666.08,2402.87) 2702.29,2402.87 ; R28.1@2691.68,2421.28 cw(c2666.08,2395.68) 2702.29,2395.68 ; R28.1@2691.68,2421.28 cw(c2666.08,2395.68) 2702.29,2395.68 ; R28.1@2691.68,2421.28 cw(c2666.08,2395.68) 2702.29,2395.68 ; 2695.63,2933.79 cw(c2731.84,2933.79) R101.1@2706.24,2959.39 ; 2695.63,2933.79 cw(c2731.84,2933.79) R101.1@2706.24,2959.39 ; 2695.63,2933.79 cw(c2731.84,2933.79) R101.1@2706.24,2959.39 ; 2695.63,2935 cw(c2728.96,2935) R101.1@2705.97,2959.14 ; 2695.63,2935 cw(c2728.96,2935) R101.1@2705.97,2959.14 ; 2695.63,2935 cw(c2728.96,2935) R101.1@2705.97,2959.14 ; 2702.29,2395.68 cw(c2738.5,2395.68) R28.1@2712.9,2421.28 ; 2702.29,2395.68 cw(c2738.5,2395.68) R28.1@2712.9,2421.28 ; 2702.29,2395.68 cw(c2738.5,2395.68) R28.1@2712.9,2421.28 ; 2702.29,2402.87 ccw(c2738.5,2402.87) v1@2712.9,2377.27 ; 2702.29,2402.87 ccw(c2738.5,2402.87) v1@2712.9,2377.27 ; 2702.29,2402.87 ccw(c2738.5,2402.87) v1@2712.9,2377.27 ; v1@2894.39,2379.97 ccw(c2868.78,2405.58) 2905,2405.58 ; v1@2894.39,2379.97 ccw(c2868.78,2405.58) 2905,2405.58 ; v1@2894.39,2379.97 ccw(c2868.78,2405.58) 2905,2405.58 ; R29.1@2894.39,2421.28 cw(c2868.78,2395.68) 2905,2395.68 ; R29.1@2894.39,2421.28 cw(c2868.78,2395.68) 2905,2395.68 ; R29.1@2894.39,2421.28 cw(c2868.78,2395.68) 2905,2395.68 ; 2905,2395.68 cw(c2941.21,2395.68) R29.1@2915.6,2421.28 ; 2905,2395.68 cw(c2941.21,2395.68) R29.1@2915.6,2421.28 ; 2905,2395.68 cw(c2941.21,2395.68) R29.1@2915.6,2421.28 ; 2905,2405.58 ccw(c2941.21,2405.58) v1@2915.6,2379.97 ; 2905,2405.58 ccw(c2941.21,2405.58) v1@2915.6,2379.97 ; 2905,2405.58 ccw(c2941.21,2405.58) v1@2915.6,2379.97 ; v1@3097.1,2378.53 ccw(c3071.49,2404.14) 3107.7,2404.14 ; v1@3097.1,2378.53 ccw(c3071.49,2404.14) 3107.7,2404.14 ; v1@3097.1,2378.53 ccw(c3071.49,2404.14) 3107.7,2404.14 ; R30.1@3097.1,2421.28 cw(c3071.49,2395.68) 3107.7,2395.68 ; R30.1@3097.1,2421.28 cw(c3071.49,2395.68) 3107.7,2395.68 ; R30.1@3097.1,2421.28 cw(c3071.49,2395.68) 3107.7,2395.68 ; 3107.7,2395.68 cw(c3143.92,2395.68) R30.1@3118.31,2421.28 ; 3107.7,2395.68 cw(c3143.92,2395.68) R30.1@3118.31,2421.28 ; 3107.7,2395.68 cw(c3143.92,2395.68) R30.1@3118.31,2421.28 ; 3107.7,2404.14 ccw(c3143.92,2404.14) v1@3118.31,2378.53 ; 3107.7,2404.14 ccw(c3143.92,2404.14) v1@3118.31,2378.53 ; 3107.7,2404.14 ccw(c3143.92,2404.14) v1@3118.31,2378.53
  Top Layer w50: R44.1@1775,2975 1955,2795 ; U9.13@1976.18,3502.09 1976.18,3560.55 2050.63,3635 2080.63,3635 ; U9.12@2076.18,3502.09 2076.18,3630.55 2080.63,3635 ; C9.2@2095.63,2795 2235.63,2795 2335.63,2895 ; 2461.85,4467.28 ccw(c2387.95,4541.18) P7.5@2487.41,4573.27 ; P7.5@2525.47,4585.55 2525.47,4499.84 ; 2695.63,2855 2655.63,2895 2335.63,2895 ; 2695.63,2935 R101.1@2695.63,2975 ; U7.4@2955.47,3202.09 2955.47,3065 3055.47,3165 U7.5@3055.47,3202.09 ; U7.13@2955.47,3502.09 2955.47,3569.84 3010.63,3625 3060.63,3625 ; U7.12@3055.47,3502.09 3055.47,3619.84 3060.63,3625 ; C7.2@3065.63,2795 3155,2795 3255,2895 C10.1@3355.63,2895 3605,2895 ; P6.5@3435.73,4585.55 3435.73,4506.26 ; 3505,4370 3505,3405 3550,3360 3550,3280 3605,3225 3605,2895 ; 3680.73,4430.73 3670,4420 3725.63,4420 ; 3725.63,4430.73 3725.63,4420 ; 4146.73,4456.73 4120.73,4430.73 4110,4420 ; 4568.73,4448.73 4550.73,4430.73 4540,4420 ; C13.2@4580,2905 4415,2905 4300,2790 3805,2790 3700,2895 v1(3695.63,2895) 3605,2895 ; 4990.73,4430.73 4980,4420 4568.73,4420 4540,4420 ; v1(5075,2630) 5140,2695 C12.1@5140,2735 ; U10.5@5314,2055 5314,1826.94 U10.A@5448,1692.94 ; U10.3@5448,2055 U10.A@5448,1692.94 ; U10.A@5485,1695 5340,1550 U10.A@5448.14,1692.8 ; C2.1@5800,1945 5700.35,1945 ; U9.13@1982.18,3521.09 cw(c2091.94,3521.09) 2014.33,3598.7 ; U9.13@1982.18,3521.09 cw(c2091.94,3521.09) 2014.33,3598.7 ; U9.13@1982.18,3521.09 cw(c2091.94,3521.09) 2014.33,3598.7 ; 2080.63,3635 2250.35,3635 D28.1@2369.88,3754.53 D27.1@2369.88,3912.01 D25.1@2369.88,4069.49 D26.1@2369.88,4226.97 2369.88,4344.25 2525.47,4499.84 ; 2315.88,2875.25 cw(c2375.63,2815.5) C11.1@2375.63,2900 ; 2315.88,2875.25 cw(c2375.63,2815.5) C11.1@2375.63,2900 ; 2315.88,2875.25 cw(c2375.63,2815.5) C11.1@2375.63,2900 ; 2335.63,2895 cw(c2358.84,2871.79) C11.1@2375.63,2900 ; 2335.63,2895 cw(c2358.84,2871.79) C11.1@2375.63,2900 ; 2335.63,2895 cw(c2358.84,2871.79) C11.1@2375.63,2900 ; 2396.58,4370.95 ccw(c2181.99,4585.55) P7.5@2485.47,4585.55 ; 2396.58,4370.95 ccw(c2181.99,4585.55) P7.5@2485.47,4585.55 ; 2396.58,4370.95 ccw(c2181.99,4585.55) P7.5@2485.47,4585.55 ; 2439.02,4412.17 cw(c2659.71,4353.04) P7.5@2545.47,4550.91 ; 2439.02,4412.17 cw(c2659.71,4353.04) P7.5@2545.47,4550.91 ; 2439.02,4412.17 cw(c2659.71,4353.04) P7.5@2545.47,4550.91 ; 2470.26,4528.77 cw(c2574.36,4500.88) P7.5@2520.47,4594.21 ; 2470.26,4528.77 cw(c2574.36,4500.88) P7.5@2520.47,4594.21 ; 2470.26,4528.77 cw(c2574.36,4500.88) P7.5@2520.47,4594.21 ; 2481.94,4456.31 ccw(c2352.7,4585.55) P7.5@2535.47,4585.55 ; 2481.94,4456.31 ccw(c2352.7,4585.55) P7.5@2535.47,4585.55 ; 2481.94,4456.31 ccw(c2352.7,4585.55) P7.5@2535.47,4585.55 ; P7.5@2499.78,4554.89 cw(c2453.66,4499.85) 2525.47,4499.85 ; P7.5@2499.78,4554.89 cw(c2453.66,4499.85) 2525.47,4499.85 ; P7.5@2499.78,4554.89 cw(c2453.66,4499.85) 2525.47,4499.85 ; P7.5@2500.74,4554.11 cw(c2474.84,4521.17) 2515.32,4510.33 ; P7.5@2500.74,4554.11 cw(c2474.84,4521.17) 2515.32,4510.33 ; P7.5@2500.74,4554.11 cw(c2474.84,4521.17) 2515.32,4510.33 ; 2515.84,4512.3 cw(c2577.27,4495.84) P7.5@2545.47,4550.91 ; 2515.84,4512.3 cw(c2577.27,4495.84) P7.5@2545.47,4550.91 ; 2515.84,4512.3 cw(c2577.27,4495.84) P7.5@2545.47,4550.91 ; 2525.47,4499.85 cw(c2597.29,4499.85) P7.5@2551.16,4554.89 ; 2525.47,4499.85 cw(c2597.29,4499.85) P7.5@2551.16,4554.89 ; 2525.47,4499.85 cw(c2597.29,4499.85) P7.5@2551.16,4554.89 ; U7.13@2961.47,3521.09 cw(c3093.66,3521.09) 3000.19,3614.56 ; U7.13@2961.47,3521.09 cw(c3093.66,3521.09) 3000.19,3614.56 ; U7.13@2961.47,3521.09 cw(c3093.66,3521.09) 3000.19,3614.56 ; 3032.44,3141.97 ccw(c2991.32,3183.09) U7.5@3049.47,3183.09 ; 3032.44,3141.97 ccw(c2991.32,3183.09) U7.5@3049.47,3183.09 ; 3032.44,3141.97 ccw(c2991.32,3183.09) U7.5@3049.47,3183.09 ; 3060.63,3625 3224.61,3625 D18.1@3354.13,3754.53 D17.1@3354.13,3912.01 D15.1@3354.13,4069.49 D16.1@3354.13,4226.97 3354.13,4424.66 ; 3354.14,4424.67 ccw(c3240.27,4538.54) P6.5@3396.84,4576.2 ; 3354.14,4424.67 ccw(c3240.27,4538.54) P6.5@3396.84,4576.2 ; 3354.14,4424.67 ccw(c3240.27,4538.54) P6.5@3396.84,4576.2 ; 3354.13,4424.66 3435.73,4506.26 ; 3395.33,4517.43 cw(c3503.06,4514.66) P6.5@3428.85,4592.8 ; 3395.33,4517.43 cw(c3503.06,4514.66) P6.5@3428.85,4592.8 ; 3395.33,4517.43 cw(c3503.06,4514.66) P6.5@3428.85,4592.8 ; P6.5@3411.96,4553.38 cw(c3377.15,4506.26) 3435.73,4506.26 ; P6.5@3411.96,4553.38 cw(c3377.15,4506.26) 3435.73,4506.26 ; P6.5@3411.96,4553.38 cw(c3377.15,4506.26) 3435.73,4506.26 ; 3417.24,4487.77 ccw(c3342,4563.01) P6.5@3445.46,4587.89 ; 3417.24,4487.77 ccw(c3342,4563.01) P6.5@3445.46,4587.89 ; 3417.24,4487.77 ccw(c3342,4563.01) P6.5@3445.46,4587.89 ; 3435.73,4506.26 cw(c3494.31,4506.26) P6.5@3459.5,4553.38 ; 3435.73,4506.26 cw(c3494.31,4506.26) P6.5@3459.5,4553.38 ; 3435.73,4506.26 cw(c3494.31,4506.26) P6.5@3459.5,4553.38 ; v2(3490,4225) ccw(c3453.79,4261.21) 3505,4261.21 ; v2(3490,4225) cw(c3453.79,4188.79) 3505,4188.79 ; v2(3490,4225) ccw(c3453.79,4261.21) 3505,4261.21 ; v2(3490,4225) cw(c3453.79,4188.79) 3505,4188.79 ; v2(3490,4225) ccw(c3453.79,4261.21) 3505,4261.21 ; v2(3490,4225) cw(c3453.79,4188.79) 3505,4188.79 ; v2(3495,3870) ccw(c3470.86,3894.14) 3505,3894.14 ; v2(3495,3870) cw(c3470.86,3845.86) 3505,3845.86 ; v2(3495,3870) ccw(c3470.86,3894.14) 3505,3894.14 ; v2(3495,3870) cw(c3470.86,3845.86) 3505,3845.86 ; v2(3495,3870) ccw(c3470.86,3894.14) 3505,3894.14 ; v2(3495,3870) cw(c3470.86,3845.86) 3505,3845.86 ; v2(3495,4065) ccw(c3470.86,4089.14) 3505,4089.14 ; v2(3495,4065) cw(c3470.86,4040.86) 3505,4040.86 ; v2(3495,4065) ccw(c3470.86,4089.14) 3505,4089.14 ; v2(3495,4065) cw(c3470.86,4040.86) 3505,4040.86 ; v2(3495,4065) ccw(c3470.86,4089.14) 3505,4089.14 ; v2(3495,4065) cw(c3470.86,4040.86) 3505,4040.86 ; 3725.63,4420 4110,4420 ; 4110,4420 4146.73,4420 4540,4420 ; 5115.25,2670.25 ccw(c5055.5,2730) C12.1@5140,2730 ; 5115.25,2670.25 ccw(c5055.5,2730) C12.1@5140,2730 ; 5115.25,2670.25 ccw(c5055.5,2730) C12.1@5140,2730 ; U10.A@5448,1692.94 U10.A@5448.14,1692.8 ; U10.A@5448.14,1692.8 5700.35,1945 ; U10.A@5448.14,1692.8 5465.45,1675.49 U10.A@5448.14,1692.8 ; U10.A@5488.37,1848 ccw(c5533.19,1994.49) U10.A@5641.51,1886.16 ; U10.A@5488.37,1848 ccw(c5533.19,1994.49) U10.A@5641.51,1886.16 ; U10.A@5488.37,1848 ccw(c5533.19,1994.49) U10.A@5641.51,1886.16 ; U10.A@5503,1895.81 ccw(c5560.75,2084.58) 5700.34,1944.99 ; U10.A@5503,1895.81 ccw(c5560.75,2084.58) 5700.34,1944.99 ; U10.A@5503,1895.81 ccw(c5560.75,2084.58) 5700.34,1944.99 ; U10.A@5584.19,1736.46 cw(c5744.57,1759.98) U10.A@5629.95,1874.6 ; U10.A@5584.19,1736.46 cw(c5744.57,1759.98) U10.A@5629.95,1874.6 ; U10.A@5584.19,1736.46 cw(c5744.57,1759.98) U10.A@5629.95,1874.6 ; U10.A@5633.66,1743.72 cw(c5867.34,1777.98) 5700.33,1944.99 ; U10.A@5633.66,1743.72 cw(c5867.34,1777.98) 5700.33,1944.99 ; U10.A@5633.66,1743.72 cw(c5867.34,1777.98) 5700.33,1944.99
  Top Layer w80: 3505,4370 3565.73,4430.73 3680.73,4430.73 3725.63,4430.73 ; D5.1@3625,4300 3725.63,4400.63 3725.63,4420 ; J1.1@3725.63,4585.55 3725.63,4430.73 ; D7.1@4058.33,4300 4146.73,4388.4 4146.73,4420 4146.73,4430.73 ; J3.1@4146.73,4585.55 4146.73,4456.73 4146.73,4430.73 ; D9.1@4491.67,4300 4568.73,4377.07 4568.73,4420 4568.73,4430.73 ; J4.1@4568.73,4585.55 4568.73,4448.73 4568.73,4430.73 ; D19.1@4925,4300 4990.73,4365.73 4990.73,4430.73 ; J5.1@4990.73,4585.55 4990.73,4430.73 ; 3725.63,4430.73 4120.73,4430.73 4146.73,4430.73 ; 4146.73,4430.73 4550.73,4430.73 4568.73,4430.73 ; 4568.73,4430.73 4990.73,4430.73
  Bottom Layer w20: C9.2@2095.63,2795 1940,2795 1688.76,2543.76 v1(1688.76,2366.87) 3052.5,2366.87 3053.56,2367.93 ; v1(2905,2369.37) 2906.44,2367.93 3053.56,2367.93 ; v1(3107.7,2367.93) 3053.56,2367.93 ; v1@1678.16,2377.47 ccw(c1652.55,2403.08) 1688.76,2403.08 ; v1@1678.16,2377.47 ccw(c1652.55,2403.08) 1688.76,2403.08 ; v1@1678.16,2377.47 ccw(c1652.55,2403.08) 1688.76,2403.08 ; 1688.76,2403.08 ccw(c1724.97,2403.08) v1@1699.37,2377.47 ; 1688.76,2403.08 ccw(c1724.97,2403.08) v1@1699.37,2377.47 ; 1688.76,2403.08 ccw(c1724.97,2403.08) v1@1699.37,2377.47 ; v1@1699.37,2377.47 ccw(c1724.97,2403.08) 1724.97,2366.87 ; v1@1699.37,2377.47 ccw(c1724.97,2403.08) 1724.97,2366.87 ; 1724.97,2366.87 ccw(c1724.97,2330.66) 1699.37,2356.26 cw(c1724.97,2330.66) 1724.97,2366.87 ; 2044.93,2795 ccw(c2044.93,2845.7) C9.2@2080.78,2809.85 ; 2044.93,2795 cw(c2044.93,2744.3) C9.2@2080.78,2780.15 ; 2044.93,2795 ccw(c2044.93,2845.7) C9.2@2080.78,2809.85 ; 2044.93,2795 cw(c2044.93,2744.3) C9.2@2080.78,2780.15 ; 2044.93,2795 ccw(c2044.93,2845.7) C9.2@2080.78,2809.85 ; 2044.93,2795 cw(c2044.93,2744.3) C9.2@2080.78,2780.15 ; 2862.75,2366.87 ccw(c2862.75,2411.61) v1@2894.39,2379.97 ; 2862.75,2366.87 ccw(c2862.75,2411.61) v1@2894.39,2379.97 ; 2862.75,2366.87 ccw(c2862.75,2411.61) v1@2894.39,2379.97 ; 2874.81,2366.87 cw(c2874.81,2339.18) v1@2894.39,2358.76 ; 2874.81,2366.87 cw(c2874.81,2339.18) v1@2894.39,2358.76 ; 2874.81,2366.87 cw(c2874.81,2339.18) v1@2894.39,2358.76 ; v1@2915.6,2358.76 cw(c2937.74,2336.63) 2937.74,2367.93 ; v1@2915.6,2358.76 cw(c2935.18,2339.18) 2935.18,2366.87 ; v1@2915.6,2358.76 cw(c2937.74,2336.63) 2937.74,2367.93 ; v1@2915.6,2358.76 cw(c2935.18,2339.18) 2935.18,2366.87 ; v1@2915.6,2358.76 cw(c2937.74,2336.63) 2937.74,2367.93 ; v1@2915.6,2358.76 cw(c2935.18,2339.18) 2935.18,2366.87 ; v1@2915.6,2379.97 ccw(c2944.68,2409.05) 2944.68,2367.93 ; v1@2915.6,2379.97 ccw(c2947.24,2411.61) 2947.24,2366.87 ; v1@2915.6,2379.97 ccw(c2944.68,2409.05) 2944.68,2367.93 ; v1@2915.6,2379.97 ccw(c2947.24,2411.61) 2947.24,2366.87 ; v1@2915.6,2379.97 ccw(c2944.68,2409.05) 2944.68,2367.93 ; v1@2915.6,2379.97 ccw(c2947.24,2411.61) 2947.24,2366.87 ; 3071.49,2367.93 ccw(c3071.49,2404.14) v1@3097.1,2378.53 ; 3071.49,2367.93 cw(c3071.49,2331.71) v1@3097.1,2357.32 ; 3071.49,2367.93 ccw(c3071.49,2404.14) v1@3097.1,2378.53 ; 3071.49,2367.93 cw(c3071.49,2331.71) v1@3097.1,2357.32 ; 3071.49,2367.93 ccw(c3071.49,2404.14) v1@3097.1,2378.53 ; 3071.49,2367.93 cw(c3071.49,2331.71) v1@3097.1,2357.32 ; 1852.77,2366.87 cw(c1852.77,2327.14) 1880.86,2355.23 ccw(c1852.77,2327.14) 1852.77,2366.87 ; 1857.74,2366.87 ccw(c1857.74,2399.56) 1880.86,2376.44 cw(c1857.74,2399.56) 1857.74,2366.87 ; v1@1902.07,2355.23 cw(c1930.17,2327.14) 1930.17,2366.87 ccw(c1930.17,2327.14) v1@1902.07,2355.23 ; v1@1902.07,2376.44 ccw(c1925.19,2399.56) 1925.19,2366.87 cw(c1925.19,2399.56) v1@1902.07,2376.44 ; 2049.41,2366.87 ccw(c2049.41,2415.18) 2083.57,2381.02 cw(c2049.41,2415.18) 2049.41,2366.87 ; 2066.51,2366.87 cw(c2066.51,2342.75) 2083.57,2359.81 ccw(c2066.51,2342.75) 2066.51,2366.87 ; v1@2104.78,2359.81 cw(c2121.83,2342.75) 2121.83,2366.87 ccw(c2121.83,2342.75) v1@2104.78,2359.81 ; v1@2104.78,2381.02 ccw(c2138.94,2415.18) 2138.94,2366.87 cw(c2138.94,2415.18) v1@2104.78,2381.02 ; 2251.61,2366.87 ccw(c2251.61,2415.89) 2286.27,2381.23 cw(c2251.61,2415.89) 2251.61,2366.87 ; 2269.72,2366.87 cw(c2269.72,2343.46) 2286.27,2360.01 ccw(c2269.72,2343.46) 2269.72,2366.87 ; v1@2307.49,2360.01 cw(c2324.04,2343.46) 2324.04,2366.87 ccw(c2324.04,2343.46) v1@2307.49,2360.01 ; v1@2307.49,2381.23 ccw(c2342.15,2415.89) 2342.15,2366.87 cw(c2342.15,2415.89) v1@2307.49,2381.23 ; 2460.85,2366.87 ccw(c2460.85,2406.65) 2488.98,2378.52 cw(c2460.85,2406.65) 2460.85,2366.87 ; 2465.89,2366.87 cw(c2465.89,2334.22) 2488.98,2357.31 ccw(c2465.89,2334.22) 2465.89,2366.87 ; v1@2510.19,2357.31 cw(c2533.28,2334.22) 2533.28,2366.87 ccw(c2533.28,2334.22) v1@2510.19,2357.31 ; v1@2510.19,2378.52 ccw(c2538.32,2406.65) 2538.32,2366.87 cw(c2538.32,2406.65) v1@2510.19,2378.52 ; 2665.58,2366.87 cw(c2665.58,2329.95) 2691.68,2356.05 ccw(c2665.58,2329.95) 2665.58,2366.87 ; 2666.58,2366.87 ccw(c2666.58,2402.37) 2691.68,2377.27 cw(c2666.58,2402.37) 2666.58,2366.87 ; v1@2712.9,2356.05 cw(c2739.01,2329.95) 2739.01,2366.87 ccw(c2739.01,2329.95) v1@2712.9,2356.05 ; v1@2712.9,2377.27 ccw(c2738,2402.37) 2738,2366.87 cw(c2738,2402.37) v1@2712.9,2377.27
  Bottom Layer w50: U9.13@1976.18,3502.09 U9.4@1976.18,3202.09 1976.18,3055 ; U9.12@2076.18,3502.09 U9.5@2076.18,3202.09 2076.18,3155 1976.18,3055 ; C9.2@2095.63,2795 1976.18,2914.45 1976.18,3055 ; U7.4@2955.47,3202.09 U7.13@2955.47,3502.09 ; U7.5@3055.47,3202.09 U7.12@3055.47,3502.09 ; 2046.08,3124.9 ccw(c1987.89,3183.09) U9.5@2070.18,3183.09 ; 2046.08,3124.9 ccw(c1987.89,3183.09) U9.5@2070.18,3183.09 ; 2046.08,3124.9 ccw(c1987.89,3183.09) U9.5@2070.18,3183.09
  other v1: 3210,2520 2505,3725 2505,3895 2505,4065 2510,4265
  other v2: 5375,1120 5615,1120 6015,1120 6380,1120 4850,1125 5110,1125 5805,1130 4850,1440 5110,1450 5800,1525 6375,1635 4850,1755 5115,1760 6385,2120 5835,2165 4760,2230 6175,2345 3465,2400 5225,2440 5615,2480 4400,2485 4695,2485 3545,2505 5965,2540 3300,2805 1880,2955 4745,2995 4365,3010 5320,3020 5100,3025 1475,3100 1475,3740 1480,4310
MPOWER: C5.1 C12.2 C13.1 F1.2 F2.2 L32.2 P5.2 P5.4 R12.2 R19.2 | length 4727.2
  Top Layer w50: F2.2@3525.63,2795 3525.63,2705.63 3520,2700 3750,2700 v3(3755,2695) ; P5.2@4960,2525 P5.4@5060,2525 5115,2525 5215,2625 5215,2825 ; L32.2@5690,2610 L32.2@5690,2652.17
  Top Layer w100: F1.2@2545.63,2795 2575.63,2765 2865.42,2765 2935.42,2695 v3(3755,2695) ; v4(4450,2705) C13.1@4580,2705 4615.81,2705 4780.81,2870 5472.17,2870 L32.2@5690,2652.17 ; 4818.79,2870 cw(c4818.79,2793.79) R19.2@4872.68,2847.68 ; 4913.79,2870 cw(c4913.79,2793.79) C5.1@4967.68,2847.68 ; C5.1@4932.32,2847.68 cw(c4986.21,2793.79) 4986.21,2870 ; R12.2@5027.32,2847.68 cw(c5081.21,2793.79) 5081.21,2870 ; 5103.79,2870 cw(c5103.79,2793.79) C12.2@5157.68,2847.68
  Bottom Layer w50: 4541.37,2695 ccw(c4541.37,2743.63) 4575.76,2709.24 cw(c4541.37,2743.63) 4541.37,2695
  Bottom Layer w100: v3(3755,2695) 3760,2700 4575,2700 C13.1@4580,2705